# EAGLE board Tube Board Double Sided (EAGLE 6.1)
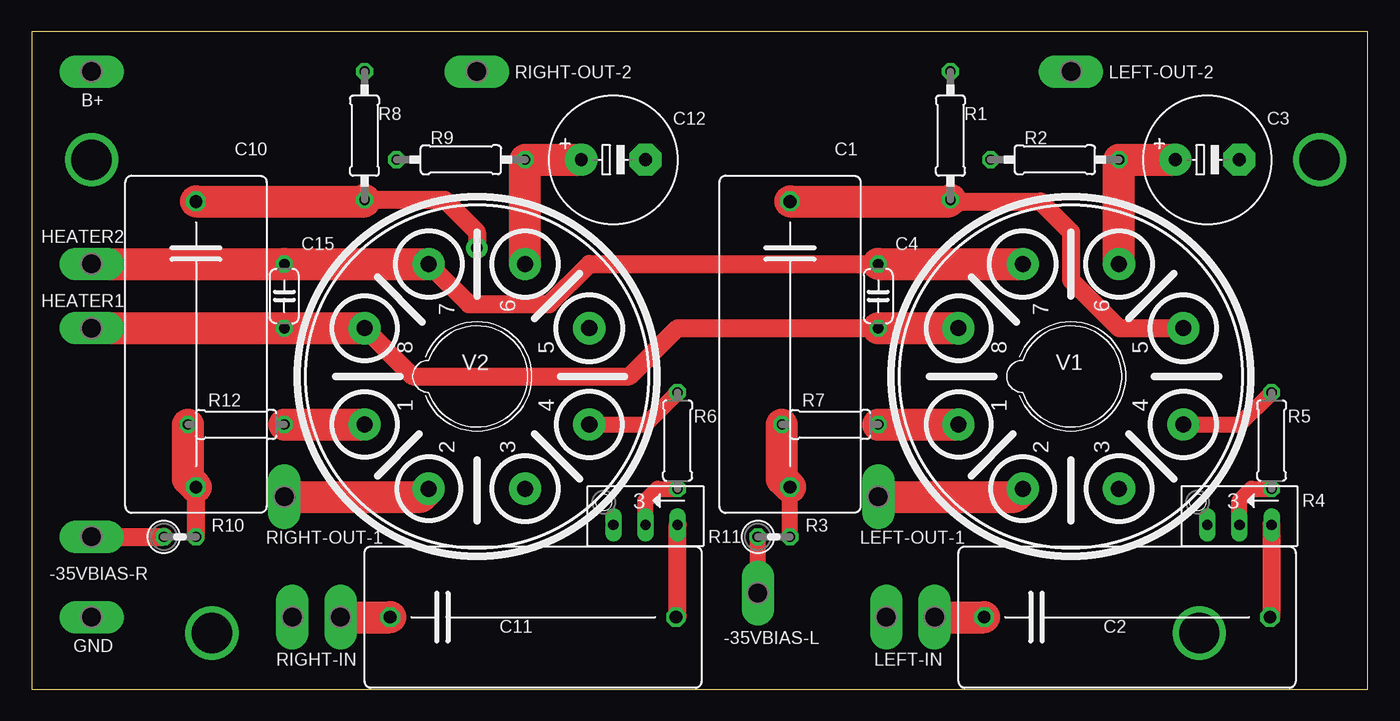
[diagram p0: board, top side]
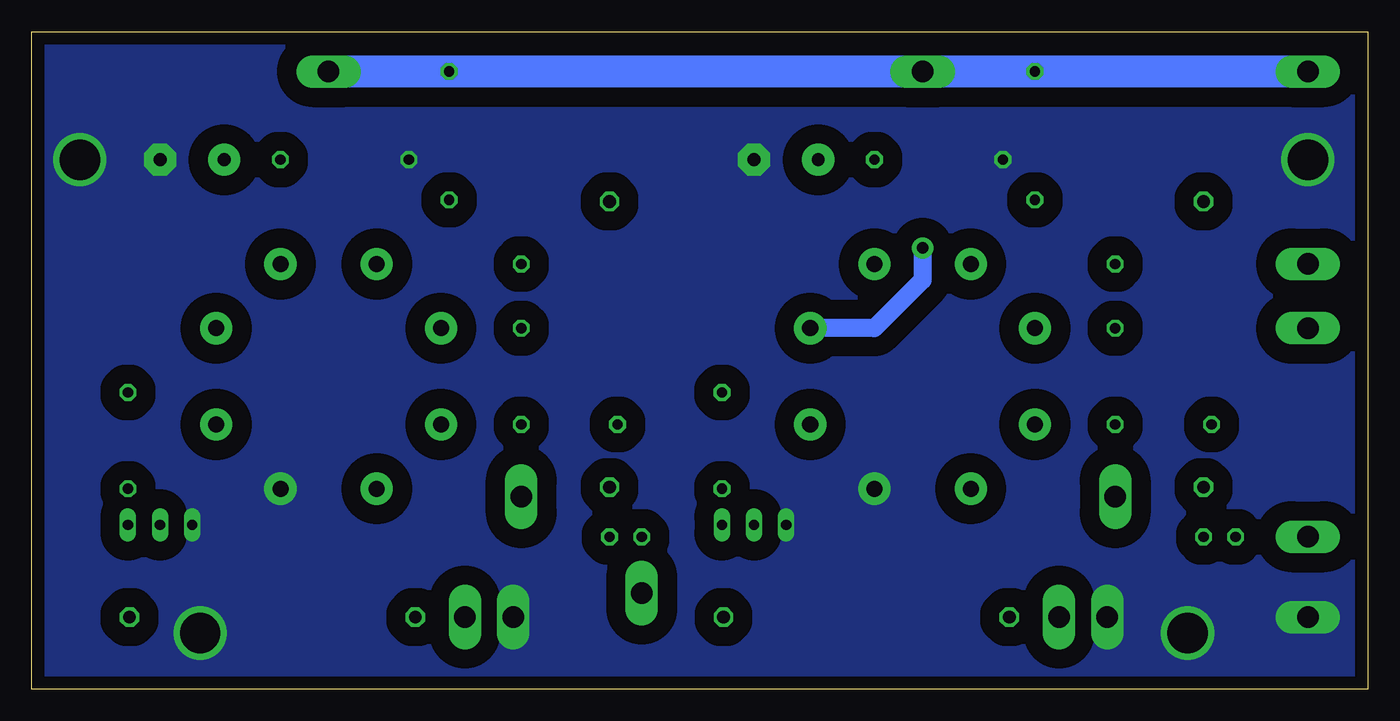
[diagram p1: board, bottom side, seen from below]

Size 105.72 x 52.05 mm. Coordinates in mm from the lower left corner, seen from the top.
Outline: 105.72,0 105.72,52.05 0,52.05 0,0 105.72,0
Copper layers (1*16): Top 0.035mm / dielectric 1.5mm / Bottom 0.035mm
Design rules: minimum track width 10mil, minimum drill 24mil, track to track 60mil, track to pad 60mil, pad to pad 60mil, via to via 60mil, smd to smd 60mil, copper to edge 40mil, drill to drill 8mil, minimum pad ring 10mil, minimum via ring 8mil, stop-mask expansion 4mil, vias tented up to drill 0mil, thermal gap 10mil

## Footprints (pad centres in the part's own frame; a part is rotated, then mirrored left to right if it is on the bottom)
P1-17Y = drill 1.702 pad 2.121 long: TP 0,0
C225-113X268 = drill 1.016 octagon: 1 -11.303,0; 2 11.303,0
E5-10,5 = drill 1.016 pad 2.54: + -2.54,0 | drill 1.016 pad 2.54 octagon: - 2.54,0
C050-024X044 = drill 0.813 octagon: 1 -2.54,0; 2 2.54,0
P2-38-17 = drill 1.702 pad 2.121 long: TP-1 -1.905,0; TP-2 1.905,0
0207/10 = drill 0.813 octagon: 1 -5.08,0; 2 5.08,0
0207/2V = drill 0.813 octagon: 1 -1.27,0; 2 1.27,0
RJ9W = drill 0.813 long: A 2.54,0.635; E -2.54,0.635; S 0,0.635
0207/7 = drill 0.813 octagon: 1 -3.81,0; 2 3.81,0
OKTAL = drill 1.27 pad 2.54: 1 3.81,-8.89; 2 8.89,-3.81; 3 8.89,3.81; 4 3.81,8.89; 5 -3.81,8.89; 6 -8.89,3.81; 7 -8.89,-3.81; 8 -3.81,-8.89

## Placement (x,y rotation side)
-35VBIAS-L  PTR1PAD1-17Y  [P1-17Y]  57.45,7.62 180 top
-35VBIAS-R  PTR1PAD1-17Y  [P1-17Y]  4.75,12.06 90 top
B+  PTR1PAD1-17Y  [P1-17Y]  4.75,48.9 90 top
C1  0.015uF  [C225-113X268]  60,27.3 270 top
C2  0.1uF  [C225-113X268]  86.67,5.71 0 top
C3  100uF  [E5-10,5]  93.02,41.91 0 top
C4  1uF  [C050-024X044]  66.98,31.11 90 top
C10  0.015uF  [C225-113X268]  13.01,27.3 270 top
C11  0.1uF  [C225-113X268]  39.68,5.71 0 top
C12  100uF  [E5-10,5]  46.02,41.91 0 top
C15  1uF  [C050-024X044]  19.99,31.11 90 top
GND  PTR1PAD1-17Y  [P1-17Y]  4.75,5.71 90 top
HEATER1  PTR1PAD1-17Y  [P1-17Y]  4.75,28.57 90 top
HEATER2  PTR1PAD1-17Y  [P1-17Y]  4.75,33.66 90 top
LEFT-IN  PTR2  [P2-38-17]  69.52,5.71 180 top
LEFT-OUT-1  PTR1PAD1-17Y  [P1-17Y]  66.98,15.24 0 top
LEFT-OUT-2  PTR1PAD1-17Y  [P1-17Y]  82.22,48.9 90 top
R1  47K  [0207/10]  72.7,43.81 90 top
R2  820R  [0207/10]  80.95,41.91 0 top
R3  470K  [0207/2V]  58.73,12.06 0 top
R4  100K  [RJ9W]  95.56,13.65 180 top
R5  33K  [0207/7]  98.09,19.68 270 top
R6  33K  [0207/7]  51.11,19.68 270 top
R7  2K2  [0207/7]  63.17,20.95 180 top
R8  47K  [0207/10]  26.34,43.81 90 top
R9  820R  [0207/10]  33.96,41.91 0 top
R10  470K  [0207/2V]  11.73,12.06 0 top
R11  100K  [RJ9W]  48.57,13.65 180 top
R12  2K2  [0207/7]  16.18,20.95 180 top
RIGHT-IN  PTR2  [P2-38-17]  22.53,5.71 180 top
RIGHT-OUT-1  PTR1PAD1-17Y  [P1-17Y]  19.99,15.24 180 top
RIGHT-OUT-2  PTR1PAD1-17Y  [P1-17Y]  35.23,48.9 90 top
V1  13EM7  [OKTAL]  82.22,24.77 270 top
V2  13EM7  [OKTAL]  35.23,24.77 270 top

## Library data of the parts
-35VBIAS-L -35VBIAS-R B+ GND HEATER1 HEATER2 LEFT-IN LEFT-OUT-1 LEFT-OUT-2 RIGHT-IN RIGHT-OUT-1 RIGHT-OUT-2 = testpad
C1-C3 C10-C12 = rcl
C4 C15 R1-R3 R5-R10 R12 = resistor
R4 R11 = pot
V1 V2 = tubes

## Nets
B+: B+.TP LEFT-OUT-2.TP R1.2 R8.2 RIGHT-OUT-2.TP
GND: C3.- C12.- GND.TP LEFT-IN.TP-2 R2.1 R4.A R9.1 R11.A RIGHT-IN.TP-2 V1.3 V2.3
HEATER: C4.1 C15.1 HEATER1.TP V1.8 V2.8
N$1: C4.2 C15.2 HEATER2.TP V1.7 V2.7
N$2: -35VBIAS-R.TP R10.1
N$3: R5.1 V1.4
N$4: C1.1 R1.1 V1.5
N$5: C3.+ R2.2 V1.6
N$6: C1.2 R3.2 R7.2
N$7: C2.2 R4.E
N$8: R4.S R5.2
N$9: C2.1 LEFT-IN.TP-1
N$10: C10.1 R8.1 V2.5
N$11: LEFT-OUT-1.TP V1.2
N$12: R6.1 V2.4
N$13: -35VBIAS-L.TP R3.1
N$14: R6.2 R11.S
N$15: R7.1 V1.1
N$16: C12.+ R9.2 V2.6
N$17: C10.2 R10.2 R12.2
N$18: C11.2 R11.E
N$19: R12.1 V2.1
N$20: C11.1 RIGHT-IN.TP-1
N$21: RIGHT-OUT-1.TP V2.2

## Tracks (layer width: path | path; a pad name or v marks a point on that pad's centre or on a via)
B+
  Bottom 2.54: B+.TP R8.2 RIGHT-OUT-2.TP R1.2 LEFT-OUT-2.TP
GND  (via drill 3.2 pad 1.68)
  other vias: 4.75,41.91 101.91,41.91 14.28,4.45 92.38,4.45
  pour Bottom (no thermals): 0.3,0 105.72,0 105.72,52.07 0.3,52.07
HEATER
  Top 1.422: V2.8 30.15,24.77 47.3,24.77 51.11,28.57 C4.1
  Top 2.54: V2.8 C15.1 HEATER1.TP | C4.1 V1.8
N$1
  Top 1.422: V2.7 34.59,30.48 40.95,30.48 44.12,33.66 C4.2
  Top 2.54: HEATER2.TP C15.2 V2.7 | C4.2 V1.7
N$2
  Top 1.422: -35VBIAS-R.TP R10.1
N$3
  Top 1.27: V1.4 95.56,20.95 R5.1
N$4
  Top 1.422: V1.5 86.03,28.57 82.22,32.38 82.22,36.2 79.81,38.61 72.7,38.61 R1.1
  Top 2.54: C1.1 72.57,38.61 R1.1
N$5
  Top 2.54: V1.6 R2.2 C3.+
N$6
  Top 1.27: R3.2 C1.2
  Top 2.54: R7.2 59.36,16.64 C1.2
N$7
  Top 1.422: R4.E 98.09,5.84 C2.2
N$8
  Top 1.27: R5.2 96.51,15.88 95.56,14.92 R4.S
N$9
  Top 2.54: LEFT-IN.TP-1 C2.1
N$10  (via drill 0.9 pad 1.68)
  Top 1.422: R8.1 32.69,38.73 35.23,36.2 v35.23,34.92
  Top 2.54: C10.1 26.34,38.61 R8.1
  Bottom 1.422: V2.5 39.04,28.57 35.23,32.38 v35.23,34.92
N$11
  Top 2.54: LEFT-OUT-1.TP 77.78,15.24 V1.2
N$12
  Top 1.27: V2.4 48.57,20.95 R6.1
N$13
  Top 1.27: -35VBIAS-L.TP R3.1
N$14
  Top 1.27: R6.2 49.52,15.88 48.57,14.92 R11.S
N$15
  Top 2.54: R7.1 V1.1
N$16
  Top 2.54: C12.+ R9.2 V2.6
N$17
  Top 1.422: R10.2 C10.2
  Top 2.54: R12.2 12.37,16.64 C10.2
N$18
  Top 1.422: R11.E 51.11,5.84 C11.2
N$19
  Top 2.54: R12.1 V2.1
N$20
  Top 2.54: RIGHT-IN.TP-1 C11.1
N$21
  Top 2.54: RIGHT-OUT-1.TP 30.79,15.24 V2.2